# Altium PCB nixie_board.PcbDoc
Units mm, origin at the board's own origin, x right, y up, seen from the top; angles counter-clockwise.
Board outline 259.08 x 63.5 mm, 2 copper layers (Top Layer, Bottom Layer); 105 components, 92 nets, 308 pads, 36 vias.
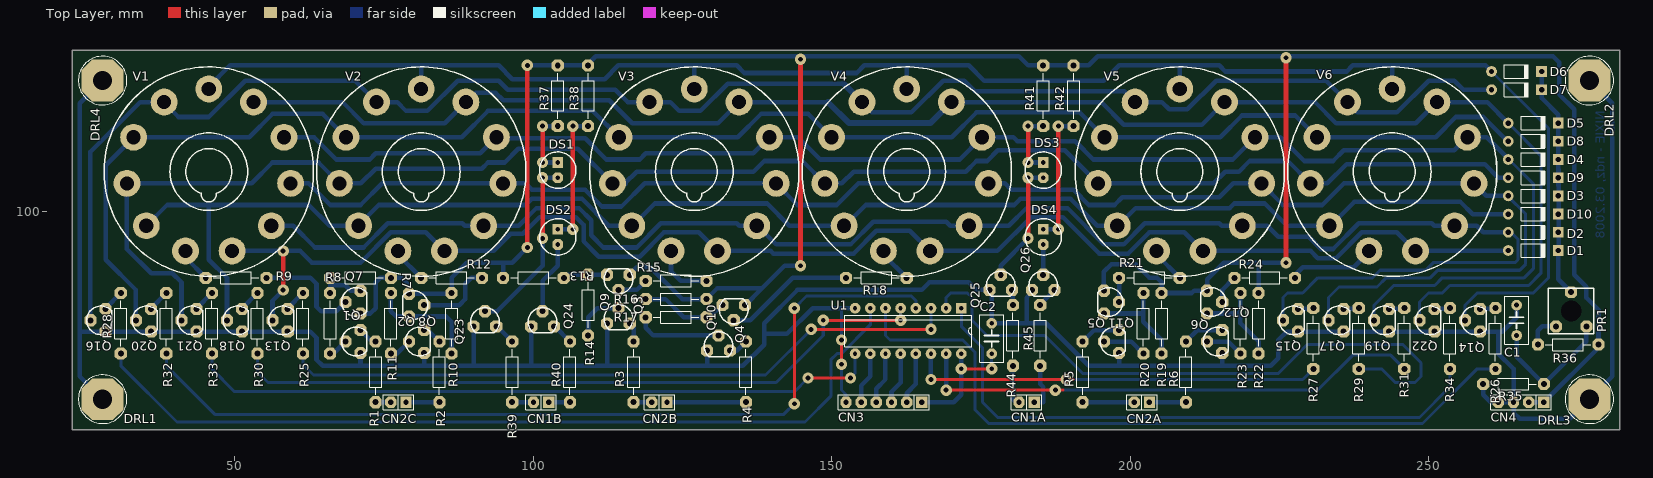
[diagram p0: Top Layer view]
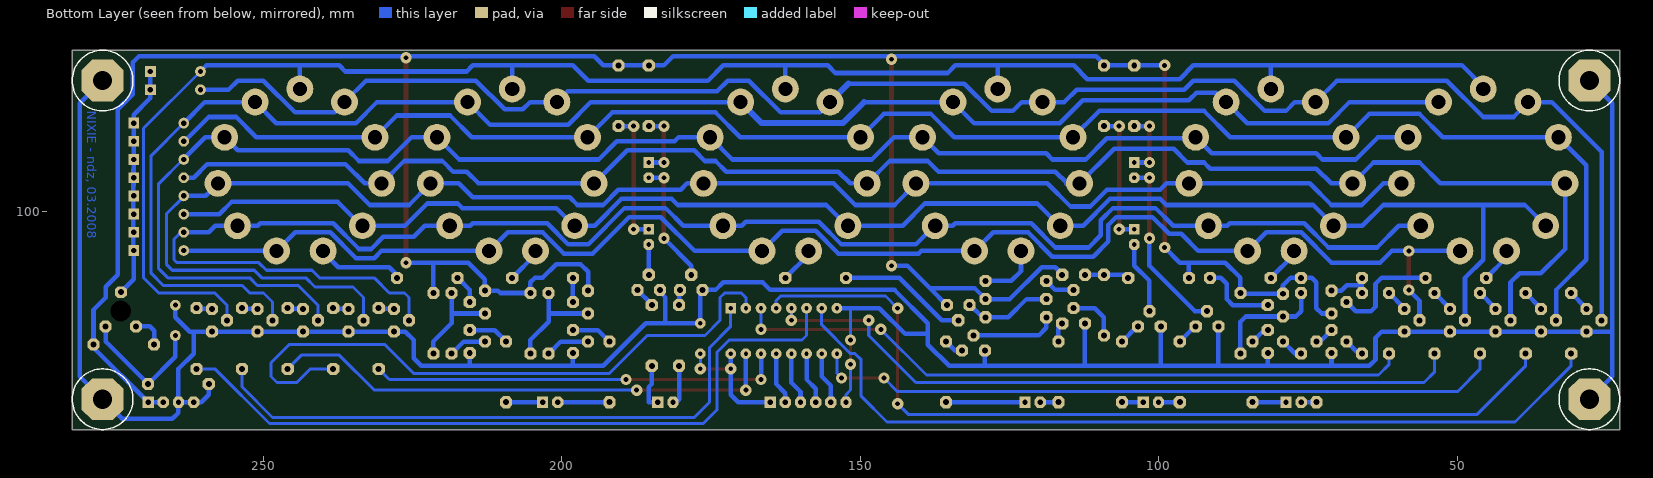
[diagram p1: Bottom Layer view, seen from below]

## Layer stack, top to bottom
Top Solder: solder mask 0.0102, Solder Resist, Dk 3.5
Top Layer: signal copper 0.0356
Dielectric1: dielectric 0.32, FR-4, Dk 4.8
Bottom Layer: signal copper 0.0356
Bottom Solder: solder mask 0.0102, Solder Resist, Dk 3.5

## Board outline
22.86,127 22.86,63.5 281.94,63.5 281.94,127

## Design rules (kind name [scope] priority, off if disabled: settings)
Clearance [All] p1: gap=0.254
FabricationTestPointUsage TestPointUsage [All] p1: valid=0 allowmultiple=FALSE
FabricationTestpoint Testpoint [All] p1: side=3 testpointundercomponent=TRUE minsize=1.016 maxsize=2.54 preferedsize=1.524 minholesize=0 maxholesize=1.016 preferedholesize=0.813 testpointgrid=0.025 allowsidetop=TRUE allowsidebottom=TRUE usegrid=TRUE gridtolerance=0
PolygonConnect [All] p1: connectstyle=Relief reliefconductorwidth=0.254 reliefentries=4 polygonreliefangle="90 Angle" airgapwidth=0.254
RoomDefinition nixie_board [InComponentClass('nixie_board')] p1: confinementstyle=ConfineIn formatcopy=TRUE lockcomponents=FALSE outline 0,0 50.8,0 50.8,25.4 0,25.4
RoutingVias [All] p1: holewidth=0.8 width=1.9 viastyle="Through Hole" minholewidth=0.711 minwidth=1.27 maxholewidth=1 maxwidth=2
SolderMaskExpansion [All] p1: expansion=0.102
Width [All] p1: maxlimit=2.54 minlimit=0.508 preferedwidth=0.762 toplayer_prefwidth=0.508 minimp=50.000000 maximp=50.000000 favimp=50.000000
28 further rules are at their usual default settings.

## Components (designator, comment, footprint, x,y, rotation, side; value= is the part's Value field where it differs from the comment)
C1 "100nF" C-RM5 264.668,81.788 r270 top
C2 "100nF" C-RM5 176.784,78.74 r270 top
CN1A "" GP2x1_maual 183.896,68.072 r180 top
CN1B "" GP2x1_maual 102.616,68.072 r180 top
CN2A "" GP2x1_maual 203.2,68.072 r180 top
CN2B "" GP2x1_maual 122.428,68.072 r180 top
CN2C "" GP2x1_maual 78.74,68.072 r180 top
CN3 "GP 6X1" GP6x1_manual 165.1,68.072 r270 top
CN4 "" GP4x1_MANUAL 269.24,68.072 r270 top
D1 "" DO35_LONG 267.462,93.472 r0 top
D2 "" DO35_LONG 267.462,96.52 r0 top
D3 "" DO35_LONG 267.462,102.616 r0 top
D4 "" DO35_LONG 267.462,108.712 r0 top
D5 "" DO35_LONG 267.462,114.808 r0 top
D6 "" DO35_LONG 264.668,123.444 r0 top
D7 "" DO35_LONG 264.668,120.396 r0 top
D8 "" DO35_LONG 267.462,111.76 r0 top
D9 "" DO35_LONG 267.462,105.664 r0 top
D10 "" DO35_LONG 267.462,99.568 r0 top
DRL1 "SCREW DRILL" "3mm screw drill I" 27.94,68.58 r0 top
DRL2 "SCREW DRILL" "3mm screw drill I" 276.86,121.92 r0 top
DRL3 "SCREW DRILL" "3mm screw drill I" 276.86,68.58 r0 top
DRL4 "SCREW DRILL" "3mm screw drill I" 27.94,121.92 r0 top
DS1 "Neon" NEON_6mm 104.14,108.204 r270 top
DS2 "Neon" NEON_6mm 104.14,97.028 r270 top
DS3 "Neon" NEON_6mm 185.42,108.204 r270 top
DS4 "Neon" NEON_6mm 185.42,97.028 r270 top
PR1 "50k" CA6V 273.812,83.312 r0 top
Q1 "BF420" TO-92 68.58,78.232 r90 top
Q2 "BF420" TO-92 79.248,78.232 r90 top
Q3 "BF420" TO-92 114.3,83.82 r0 top
Q4 "BF420" TO-92 131.064,79.248 r0 top
Q5 "BF420" TO-92 195.58,78.232 r90 top
Q6 "BF420" TO-92 212.852,78.232 r90 top
Q7 "BF421" TO-92 68.58,84.836 r90 top
Q8 "BF421" TO-92 81.788,84.328 r270 top
Q9 "BF421" TO-92 114.3,86.868 r180 top
Q10 "BF421" TO-92 133.604,81.788 r180 top
Q11 "BF421" TO-92 198.12,84.836 r270 top
Q12 "BF421" TO-92 215.392,84.836 r270 top
Q13 "BF420" TO-92 56.388,81.788 r90 top
Q14 "BF420" TO-92 256.032,81.788 r90 top
Q15 "BF420" TO-92 225.552,81.788 r90 top
Q16 "BF420" TO-92 25.908,81.788 r90 top
Q17 "BF420" TO-92 233.172,81.788 r90 top
Q18 "BF420" TO-92 48.768,81.788 r90 top
Q19 "BF420" TO-92 240.792,81.788 r90 top
Q20 "BF420" TO-92 33.528,81.788 r90 top
Q21 "BF420" TO-92 41.148,81.788 r90 top
Q22 "BF420" TO-92 248.412,81.788 r90 top
Q23 "BF420" TO-92 91.948,83.312 r0 top
Q24 "BF420" TO-92 101.6,83.312 r0 top
Q25 "BF420" TO-92 178.308,89.408 r0 top
Q26 "BF420" TO-92 185.42,89.408 r0 top
R1 "33k" R10-2 73.66,68.072 r90 top
R2 "33k" R10-2 84.328,68.072 r90 top
R3 "33k" R10-2 116.84,68.072 r90 top
R4 "33k" R10-2 135.636,68.072 r90 top
R5 "33k" R10-2 192.024,68.072 r90 top
R6 "33k" R10-2 209.296,68.072 r90 top
R7 "100k" R10-2 66.04,88.9 r0 top
R8 "470k" R10-2 66.04,76.2 r90 top
R9 "47k" R10-2 45.212,88.9 r0 top
R10 "100k" R10-2 86.36,76.2 r90 top
R11 "470k" R10-2 76.2,76.2 r90 top
R12 "47k" R10-2 81.28,88.9 r0 top
R13 "100k" R10-2 105.156,88.9 r180 top
R14 "470k" R10-2 109.22,79.248 r90 top
R15 "47k" R10-2 129.032,88.392 r180 top
R16 "100k" R10-2 118.872,85.344 r0 top
R17 "470k" R10-2 118.872,82.296 r0 top
R18 "47k" R10-2 162.56,88.9 r180 top
R19 "100k" R10-2 205.232,76.2 r90 top
R20 "470k" R10-2 202.184,76.2 r90 top
R21 "47k" R10-2 208.28,88.9 r180 top
R22 "100k" R10-2 221.488,76.2 r90 top
R23 "470k" R10-2 218.44,76.2 r90 top
R24 "47k" R10-2 227.584,88.9 r180 top
R25 "33k" R10-2 61.468,76.2 r90 top
R26 "33k" R10-2 261.112,73.66 r90 top
R27 "33k" R10-2 230.632,73.66 r90 top
R28 "33k" R10-2 30.988,76.2 r90 top
R29 "33k" R10-2 238.252,73.66 r90 top
R30 "33k" R10-2 53.848,76.2 r90 top
R31 "33k" R10-2 245.872,73.66 r90 top
R32 "33k" R10-2 38.608,76.2 r90 top
R33 "33k" R10-2 46.228,76.2 r90 top
R34 "33k" R10-2 253.492,73.66 r90 top
R35 "91k" R10-2 259.08,71.12 r0 top
R36 "300k" R10-2 268.224,77.724 r0 top
R37 "33k" R10-2 104.14,114.3 r90 top
R38 "33k" R10-2 109.22,114.3 r90 top
R39 "33k" R10-2 96.52,78.232 r270 top
R40 "33k" R10-2 106.172,78.232 r270 top
R41 "33k" R10-2 185.42,114.3 r90 top
R42 "33k" R10-2 190.5,114.3 r90 top
R44 "33k" R10-2 180.34,84.328 r270 top
R45 "33k" R10-2 184.912,84.328 r270 top
U1 "4028" DIP16_MANUAL 171.704,83.82 r270 top
V1 "Nixie Tube" LC516_NIXIE_TUBE 45.72,106.68 r0 top
V2 "Nixie Tube" LC516_NIXIE_TUBE 81.28,106.68 r0 top
V3 "Nixie Tube" LC516_NIXIE_TUBE 127,106.68 r0 top
V4 "Nixie Tube" LC516_NIXIE_TUBE 162.56,106.68 r0 top
V5 "Nixie Tube" LC516_NIXIE_TUBE 208.28,106.68 r0 top
V6 "Nixie Tube" LC516_NIXIE_TUBE 243.84,106.68 r0 top

## Footprints (in the part's own frame and the unit in brackets; to place one, negate y for a bottom-side part, rotate by r counter-clockwise, add the part's x,y. Pads: shape width x height; smd on the part's side, far side on the other; paste and mask are expansions set on the pad)
"3mm screw drill I" [mm]
  oct 7x7 hole 3.2: 0(0,0)
  silkscreen extent -4.06,-4.06 4.06,4.06
C-RM5 [mm]
  round 1.8 hole 0.8: 1(-2.54,0) 2(2.54,0)
  silkscreen extent -4,-2 4,2
CA6V [mm]
  round 0 hole 3.5: 0(0,0)
  oct 2x2 hole 1: 1(-2.54,-2.54) 2(2.54,-2.54) 3(0,3.175)
  silkscreen extent -3.81,-3.81 3.81,3.81
DIP16_MANUAL [mm]
  rect 1.8x1.8 hole 0.7: 1(0,0)
  round 1.8 hole 0.7: 2(0,-2.54) 3(0,-5.08) 4(0,-7.62) 5(0,-10.16) 6(0,-12.7) 7(0,-15.24) 8(0,-17.78) 9(7.62,-17.78) 10(7.62,-15.24) 11(7.62,-12.7) 12(7.62,-10.16) 13(7.62,-7.62) 14(7.62,-5.08) 15(7.62,-2.54) 16(7.62,0)
  silkscreen extent 1.2,-19.56 6.42,1.78
DO35_LONG [mm]
  round 1.8 hole 0.9: 1(-4.191,0)
  rect 1.8x1.8 hole 0.9: 2(4.191,0)
  silkscreen extent -2.04,-1.15 2.03,1.15
GP2x1_maual [mm] "Goldpin 2x1"
  rect 1.9x1.9 hole 0.9: 1(0,0)
  oct 1.9x1.9 hole 0.9: 2(2.54,0)
  silkscreen extent -1.27,-1.27 3.81,1.27
GP4x1_MANUAL [mm]
  rect 1.9x1.9 hole 0.9: 1(0,0)
  oct 1.9x1.9 hole 0.9: 2(0,-2.54) 3(0,-5.08) 4(0,-7.62)
  silkscreen extent -1.27,-8.89 1.27,1.27
GP6x1_manual [mm] "Goldpin 6x1"
  rect 1.9x1.9 hole 0.9: 1(0,0)
  oct 1.9x1.9 hole 0.9: 2(0,-2.54) 3(0,-5.08) 4(0,-7.62) 5(0,-10.16) 6(0,-12.7)
  silkscreen extent -1.27,-13.97 1.27,1.27
LC516_NIXIE_TUBE [mm]
  round 4.5 hole 2.36: 1(3.899,-13.283) 2(10.462,-9.065) 3(13.702,-1.972) 4(12.593,5.749) 5(7.483,11.646) 6(0,13.843) 7(-7.483,11.646) 8(-12.592,5.752) 9(-13.702,-1.97) 10(-10.463,-9.064) 11(-3.902,-13.282)
  silkscreen extent -17.52,-17.53 17.53,17.53
NEON_6mm [mm]
  rect 1.8x1.8 hole 0.8: 1(0,0)
  oct 1.8x1.8 hole 0.8: 2(2.54,0)
  silkscreen extent -1.78,-3.04 4.32,3.05
R10-2 [mil]
  oct 80x80 hole 39.37: 1(0,0) 2(400,0)
  silkscreen extent 50,-39 350,39
TO-92 [mil]
  oct 80x80 hole 39.37: 1(-75,-100) 2(0,0) 3(75,-100)
  silkscreen extent -94,-141 94,24

## Part data
C1 C2: library part Cap, "Capacitor"
CN1A CN1B CN2A CN2B CN2C: library part "GP 2X1", "Goldpin, 2-Pin"
CN3: "Gold Pin, 6-Pin"
CN4: library part "GP 4X1", "Gold Pin, 4-Pin"
D1 D2 D3 D4 D5 D6 D7 D8 D9 D10: library part BAVP21, "Fast rectifier diode: 250V 0.25A, <50ns DO35"
DRL1 DRL2 DRL3 DRL4: "Screw Drill"
DS1 DS2 DS3 DS4: "Neon Bulb"
PR1: library part RPot, "Potentiometer"
Q1 Q2 Q3 Q4 Q5 Q6 Q13 Q14 Q15 Q16 Q17 Q18 Q19 Q20 Q21 Q22 Q23 Q24 Q25 Q26: "NPN Transistor, 300V, 0.1A, 0.83W"
Q7 Q8 Q9 Q10 Q11 Q12: "PNP Transistor, 300V, 0.1A, 0.83W"
R1 R2 R3 R4 R5 R6 R7 R8 R9 R10 R11 R12 R13 R14 R15 R16 R17 R18 R19 R20 R21 R22 R23 R24 R25 R26 R27 R28 R29 R30 R31 R32 R33 R34 R35 R36 R37 R38 R39 R40 R41 R42 R44 R45: library part Res, "Resistor"
U1: "BCD-to-Decimal Decoder"
V1 V2 V3 V4 V5 V6: library part LC516, "LC-516 Nixie Tube"

## Via types
v1: diameter 1.9, hole 0.8, Top Layer to Bottom Layer, 36 vias

## Nets (pads, with @x,y where several pads share a name; then routed paths per layer and width w, separated by ;. In a path a pad name is that pad's centre, name@x,y a point inside that pad or via, vN(x,y) a via of type N, cw(c..) or ccw(c..) an arc to the next point about the centre after c; other vN are vias at no path point)
ANODE_H1: CN2C.1 R2.1 | length 5.6
  Bottom Layer w0.762: CN2C.1 R2.1
ANODE_H10: CN2C.2 R1.1 | length 2.5
  Bottom Layer w0.762: R1.1 CN2C.2
ANODE_M1: CN2B.1 R4.1 | length 13.2
  Bottom Layer w0.762: CN2B.1 R4.1
ANODE_M10: CN2B.2 R3.1 | length 3
  Bottom Layer w0.762: R3.1 CN2B.2
ANODE_S1: CN2A.1 R6.1 | length 5.1
  Bottom Layer w0.762: CN2A.1 R6.1@208.28,68.072
ANODE_S10: CN2A.2 R5.1 | length 8.6
  Bottom Layer w0.762: R5.1 CN2A.2
GND: C1.1 C2.1 CN3.6 CN4.3 CN4.4 DRL1.0 DRL2.0 DRL3.0 DRL4.0 Q1.1 Q2.1 Q3.1 Q4.1 Q5.1 Q6.1 Q13.1 Q14.1 Q15.1 Q16.1 Q17.1 Q18.1 Q19.1 Q20.1 Q21.1 Q22.1 Q23.1 Q24.1 Q25.1 Q26.1 R35.1 U1.8 | length 489.6
  Top Layer w0.508: v1(151.638,74.422) v1(151.638,78.486)
  Bottom Layer w0.508: v1(151.638,74.422) 151.638,70.104 152.4,69.342 CN3.6 ; v1(151.638,78.486) 151.638,83.82
  Bottom Layer w0.762: DRL4.0 24.13,118.11 24.13,79.756 ; DRL1.0@28.194,68.326 DRL1.0 24.13,72.39 24.13,79.756 ; Q1.1 71.12,74.168 ; Q2.1 81.788,74.168 ; Q23.1 90.043,74.295 90.17,74.168 ; Q24.1 99.695,74.295 99.822,74.168 ; Q3.1 112.395,74.295 112.268,74.168 ; Q4.1 129.159,74.295 129.032,74.168 ; U1.8 151.638,83.82 146.812,83.82 142.494,79.502 138.684,79.502 ; Q26.1 183.515,86.487 182.626,85.598 182.626,81.28 ; Q5.1 198.12,74.168 ; Q6.1 215.392,74.168 ; R35.1 259.08,69.342 260.35,68.072 CN4.4 CN4.3 ; C1.1 264.668,82.296 262.255,79.883 261.62,79.883 ; DRL2.0 280.67,118.11 280.67,72.39 DRL3.0 273.558,65.278 265.176,65.278 264.16,66.294 CN4.3 ; 24.13,79.756 24.257,79.883 Q16.1 Q20.1 Q21.1 Q18.1 Q13.1 62.738,79.883 63.754,78.867 63.754,75.184 64.77,74.168 71.12,74.168 ; 71.12,74.168 81.788,74.168 ; 81.788,74.168 90.17,74.168 ; 90.17,74.168 99.822,74.168 ; 99.822,74.168 112.268,74.168 ; 112.268,74.168 129.032,74.168 ; 129.032,74.168 135.128,74.168 138.684,77.724 138.684,79.502 ; 138.684,79.502 138.684,81.28 144.272,86.868 165.1,86.868 166.37,88.138 172.974,88.138 174.244,86.868 Q25.1 176.784,86.487 C2.1 182.626,81.28 ; 182.626,81.28 185.928,81.28 193.04,74.168 198.12,74.168 ; 198.12,74.168 215.392,74.168 ; 215.392,74.168 223.52,74.168 224.79,75.438 224.79,78.486 226.187,79.883 Q15.1 Q17.1 Q19.1 Q22.1 Q14.1 261.62,79.883 ; 261.62,79.883 261.62,76.2 264.16,73.66 CN4.3
NEON1A: CN1A.2 R44.2 | length 6.3
  Bottom Layer w0.762: R44.2 180.34,68.58 CN1A.2@180.848,68.072
NEON1B: CN1B.2 R39.2 | length 3.6
  Bottom Layer w0.762: R39.2 CN1B.2
NEON2A: CN1A.1 R45.2 | length 7.8
  Bottom Layer w0.762: CN1A.1 185.42,68.072 185.42,70.612 184.912,71.12 R45.2
NEON2B: CN1B.1 R40.2 | length 3.6
  Bottom Layer w0.762: CN1B.1 R40.2
NetC1_2: C1.2 PR1.2 R35.2 | length 22.6
  Bottom Layer w0.762: C1.2 264.668,75.692 R35.2 276.352,78.232 PR1.2
NetCN3_2: CN3.2 U1.13 | length 8.8
  Bottom Layer w0.762: CN3.2 162.56,69.596 164.084,71.12 U1.13
NetCN3_3: CN3.3 U1.12 | length 8.8
  Bottom Layer w0.762: CN3.3 160.02,69.85 161.544,71.374 U1.12
NetCN3_4: CN3.4 U1.11 | length 8.8
  Bottom Layer w0.762: CN3.4 157.48,70.358 159.004,71.882 U1.11
NetCN3_5: CN3.5 U1.10 | length 8.8
  Bottom Layer w0.762: CN3.5 154.94,70.866 156.464,72.39 U1.10
NetD1_1: D1.1 Q13.2 V1.1 V2.1 V3.1 V4.1 V5.1 V6.1 | length 254.6
  Top Layer w0.762: v1(58.166,86.868) v1(58.166,93.397) v1@58.166,93.726
  Bottom Layer w0.762: V1.1 v1(58.166,93.397) 61.035,93.397 62.992,91.44 71.12,91.44 76.2,96.52 82.057,96.52 V2.1 93.397,93.397 96.266,96.266 98.298,96.266 101.092,99.06 107.188,99.06 108.458,97.79 108.458,94.996 110.998,92.456 117.856,92.456 121.92,96.52 127.777,96.52 V3.1 139.775,93.397 140.208,92.964 153.67,92.964 157.48,96.774 163.083,96.774 V4.1 177.725,93.397 183.388,99.06 188.722,99.06 194.818,92.964 199.644,92.964 203.2,96.52 209.057,96.52 V5.1 230.199,93.397 231.394,92.202 234.442,92.202 238.76,96.52 244.617,96.52 V6.1 263.196,93.397 D1.1 ; Q13.2 56.388,85.09 v1(58.166,86.868)
NetD1_2: D1.2 D2.2 D3.2 D4.2 D5.2 D6.2 D7.2 D8.2 D9.2 D10.2 PR1.3 | length 39.5
  Bottom Layer w0.762: D6.2@268.859,123.952 D6.2 D7.2 268.859,118.999 271.653,116.205 D5.2 D8.2 271.667,108.712 271.682,105.664 271.696,102.616 271.711,99.568 271.725,96.52 D1.2@271.74,93.472 ; D1.2 271.653,88.646 PR1.3
NetD2_1: D2.1 Q15.2 V1.2 V2.2 V3.2 V4.2 V5.2 V6.2 | length 281.9
  Bottom Layer w0.508: Q15.2 225.552,85.598 226.314,86.36 228.854,86.36 231.394,88.9 240.538,88.9 241.808,90.17 249.428,90.17 250.698,91.44 264.414,91.44 264.922,91.948 264.922,95.377 D2.1@263.271,97.028
  Bottom Layer w0.762: V1.2 59.865,97.615 63.5,93.98 71.628,93.98 75.692,98.044 88.138,98.044 88.567,97.615 V2.2 97.615,97.615 100.584,100.584 107.696,100.584 109.728,98.552 109.728,96.012 111.76,93.98 117.348,93.98 121.412,98.044 134.112,98.044 134.541,97.615 V3.2 ; V3.2@137.589,97.615 140.716,94.488 153.162,94.488 156.972,98.298 169.164,98.298 169.847,97.615 V4.2 179.657,97.615 182.626,100.584 189.484,100.584 195.58,94.488 198.882,94.488 202.438,98.044 214.884,98.044 215.313,97.615 V5.2 ; V5.2@218.742,97.488 V5.2 ; D2.1 259.08,96.52 257.985,97.615 V6.2 250.873,97.615 250.444,98.044 238.252,98.044 233.934,93.726 231.902,93.726 229.87,95.758 224.79,95.758 222.933,97.615 V5.2
NetD3_1: D3.1 Q17.2 V1.3 V2.3 V3.3 V4.3 V5.3 V6.3 | length 271.8
  Bottom Layer w0.508: Q17.2 233.172,85.598 234.95,87.376 241.3,87.376 242.824,88.9 250.19,88.9 251.46,90.17 265.176,90.17 266.192,91.186 266.192,99.568 D3.1@263.271,102.489
  Bottom Layer w0.762: V1.3 62.424,104.708 66.04,101.092 71.12,101.092 74.736,104.708 V2.3 98.746,104.708 99.822,103.632 108.712,103.632 111.506,100.838 114.808,100.838 118.678,104.708 V3.3 140.702,104.662 144.272,101.092 150.876,101.092 154.492,104.708 V4.3 179.01,104.708 180.086,103.632 190.5,103.632 193.04,101.092 197.358,101.092 198.628,102.362 214.884,102.362 217.23,104.708 V5.3 221.982,104.662 225.552,101.092 232.156,101.092 235.772,104.708 V6.3 257.542,104.662 259.588,102.616 D3.1 D3.1@263.271,102.489
NetD4_1: D4.1 Q19.2 V1.4 V2.4 V3.4 V4.4 V5.4 V6.4 | length 274.1
  Bottom Layer w0.508: Q19.2 240.792,84.328 244.094,87.63 250.952,87.63 252.222,88.9 265.938,88.9 267.462,90.424 267.462,104.648 D4.1@263.398,108.712
  Bottom Layer w0.762: V1.4 63.339,112.429 67.056,108.712 72.644,108.712 73.66,109.728 91.171,109.728 V2.4@93.7,112.257 ; V2.4 V2.4@93.7,112.257 ; D4.1@263.398,108.712 D4.1 263.271,108.839 259.681,112.429 V6.4 254.239,110.236 235.712,110.236 233.934,108.458 229.108,108.458 225.137,112.429 V5.4 217.155,108.712 193.802,108.712 190.754,111.76 181.102,111.76 180.433,112.429 V4.4 171.435,108.712 148.082,108.712 144.365,112.429 V3.4 136.891,109.728 118.872,109.728 117.856,108.712 112.268,108.712 108.723,112.257 V2.4@93.7,112.257
NetD5_1: D5.1 Q22.2 V1.5 V2.5 V3.5 V4.5 V5.5 V6.5 | length 280.4
  Bottom Layer w0.508: Q22.2 248.412,84.836 249.936,86.36 252.222,86.36 253.492,87.63 266.7,87.63 268.732,89.662 268.732,109.347 D5.1
  Bottom Layer w0.762: V1.5 68.11,118.326 71.628,114.808 85.244,114.808 V2.5 ; V2.5@88.862,118.326 90.424,119.888 93.726,119.888 94.996,118.618 112.776,118.618 116.586,114.808 130.964,114.808 V3.5 149.39,118.326 ; V4.5 195.11,118.326 198.882,114.554 211.99,114.554 V5.5 230.924,118.326 234.442,114.808 247.804,114.808 V6.5 259.753,118.326 D5.1
  Bottom Layer w1.016: V2.5 V2.5@88.862,118.326 ; 149.39,118.326 152.908,114.808 166.524,114.808 V4.5
NetD6_1: D6.1 Q14.2 V1.6 V2.6 V3.6 V4.6 V5.6 V6.6 | length 299.5
  Bottom Layer w0.508: Q14.2 256.032,84.328 258.064,86.36 267.462,86.36 270.002,88.9 270.002,113.919 D6.1
  Bottom Layer w0.762: V1.6@45.72,120.904 49.276,124.46 81.28,124.46 ; V2.6 81.28,124.46 ; V3.6 127,124.46 ; V4.6 162.56,124.46 ; V5.6 208.28,124.46 ; V6.6 243.84,124.46 ; D6.1 259.461,124.46 243.84,124.46 ; 81.28,124.46 94.234,124.46 96.52,122.174 112.014,122.174 114.3,124.46 127,124.46 ; 127,124.46 134.112,124.46 135.382,123.19 154.178,123.19 155.448,124.46 162.56,124.46 ; 162.56,124.46 172.974,124.46 175.514,121.92 195.58,121.92 198.12,124.46 208.28,124.46 ; 208.28,124.46 214.884,124.46 215.9,123.444 236.22,123.444 237.236,124.46 243.84,124.46
  Bottom Layer w1.016: V1.6 V1.6@45.72,120.904
NetD7_1: D7.1 Q16.2 V1.7 V2.7 V3.7 V4.7 V5.7 V6.7 | length 291.4
  Bottom Layer w0.762: Q16.2 25.908,109.982 34.252,118.326 V1.7 ; V1.7@38.237,118.227 40.64,115.824 45.72,115.824 51.816,121.92 70.204,121.92 V2.7 77.254,118.326 78.74,116.84 82.296,116.84 87.376,121.92 94.234,121.92 95.758,120.396 113.792,120.396 115.862,118.326 V3.7 122.974,118.326 124.46,116.84 128.016,116.84 132.588,121.412 151.992,121.412 ; V4.7 155.077,118.227 156.718,116.586 163.322,116.586 168.656,121.92 172.212,121.92 173.99,120.142 198.982,120.142 V5.7 205.27,118.326 206.502,117.094 209.55,117.094 214.376,121.92 232.764,121.92 V6.7 236.357,118.227 237.998,116.586 244.602,116.586 249.936,121.92 254.254,121.92 255.778,120.396 D7.1
  Bottom Layer w1.016: V1.7@38.237,118.227 V1.7 ; 151.992,121.412 V4.7
NetD8_1: D8.1 Q20.2 V1.8 V2.8 V3.8 V4.8 V5.8 V6.8 | length 284.5
  Bottom Layer w0.762: Q20.2 33.528,86.868 28.448,91.948 28.448,107.751 V1.8 52.488,112.432 56.388,116.332 64.788,116.332 V2.8 88.048,112.432 92.456,116.84 110,116.84 V3.8 134.276,112.432 138.176,116.332 146.068,116.332 V4.8 170.09,112.432 174.244,116.586 191.534,116.586 V5.8 215.048,112.432 218.694,116.078 227.602,116.078 V6.8 251.116,112.432 254.508,115.824 259.08,115.824 263.144,111.76 D8.1
NetD9_1: D9.1 Q21.2 V1.9 V2.9 V3.9 V4.9 V5.9 V6.9 | length 281.2
  Bottom Layer w0.762: V1.9@32.004,105.156 32.004,93.726 36.068,89.662 39.624,89.662 41.148,88.138 Q21.2 ; V1.9 52.894,104.71 56.388,108.204 64.084,108.204 V2.9 71.182,104.71 73.66,107.188 91.44,107.188 92.456,108.204 95.25,108.204 97.536,110.49 107.518,110.49 V3.9 ; V3.9@115.378,104.71 117.348,106.68 136.906,106.68 138.684,108.458 145.11,108.458 V4.9 151.7,104.71 153.67,106.68 172.466,106.68 174.244,108.458 176.022,108.458 177.8,110.236 189.052,110.236 V5.9 213.93,104.71 215.9,106.68 218.186,106.68 219.964,108.458 226.39,108.458 V6.9 232.98,104.71 236.22,107.95 259.334,107.95 261.62,105.664 D9.1
  Bottom Layer w1.016: V3.9 V3.9@115.378,104.71
NetD10_1: D10.1 Q18.2 V1.10 V2.10 V3.10 V4.10 V5.10 V6.10 | length 267.6
  Bottom Layer w0.762: V1.10 38.732,101.092 45.72,101.092 ; Q18.2 48.768,88.9 45.72,91.948 45.72,101.092 ; V2.10 65.96,97.616 62.484,101.092 45.72,101.092 ; V2.10@70.817,97.741 74.168,101.092 98.806,101.092 99.822,102.108 108.204,102.108 112.696,97.616 V3.10 116.666,97.616 120.396,101.346 139.192,101.346 142.922,97.616 V4.10 152.226,97.616 155.702,101.092 180.594,101.092 181.61,102.108 189.992,102.108 194.484,97.616 V5.10 V5.10@197.817,97.741 ; V5.10@197.946,97.616 200.914,100.584 216.662,100.584 217.424,101.346 222.504,101.346 226.234,97.616 V6.10 233.506,97.616 237.49,101.6 255.27,101.6 257.302,99.568 D10.1
  Bottom Layer w1.016: V2.10 V2.10@70.817,97.741
NetDS1_1: DS1.1 R37.1 | length 11.2
  Top Layer w0.762: v1(101.6,108.204) v1(101.6,114.3)
  Bottom Layer w0.762: v1(101.6,108.204) DS1.1 ; v1(101.6,114.3) R37.1
NetDS1_2: DS1.2 Q23.2 | length 30.1
  Top Layer w0.762: v1(101.6,95.504) v1(101.6,105.664)
  Bottom Layer w0.762: Q23.2 93.98,83.312 101.6,90.932 v1(101.6,95.504) ; v1(101.6,105.664) DS1.2
NetDS2_1: DS2.1 R38.1 | length 22.2
  Top Layer w0.762: v1(106.68,97.028) v1(106.68,114.3)
  Bottom Layer w0.762: DS2.1 v1@106.513,97.028 ; v1(106.68,114.3) R38.1
NetDS2_2: DS2.2 Q24.2 | length 12.2
  Bottom Layer w0.762: Q24.2 101.6,88.392 104.14,90.932 DS2.2
NetDS3_1: DS3.1 R41.1 | length 11.2
  Top Layer w0.762: v1(182.88,108.204) v1(182.88,114.3)
  Bottom Layer w0.762: v1(182.88,108.204) DS3.1 ; v1(182.88,114.3) R41.1
NetDS3_2: DS3.2 Q25.2 | length 20.7
  Top Layer w0.762: v1(182.88,95.504) v1(182.88,105.664)
  Bottom Layer w0.762: Q25.2 178.308,90.932 v1(182.88,95.504) ; v1(182.88,105.664) DS3.2
NetDS4_1: DS4.1 R42.1 | length 22.4
  Top Layer w0.762: v1(187.96,97.028) v1(187.96,114.3)
  Bottom Layer w0.762: DS4.1 v1(187.96,97.028) ; v1(187.96,114.3) R42.1
NetDS4_2: DS4.2 Q26.2 | length 5.1
  Bottom Layer w0.762: Q26.2 DS4.2
NetPR1_1: PR1.1 R36.1 | length 5.1
  Bottom Layer w0.762: R36.1 268.224,80.01 268.986,80.772 PR1.1@270.764,80.772
NetQ1_2: Q1.2 R8.1 | length 3.4
  Bottom Layer w0.762: R8.1 66.548,76.2 Q1.2
NetQ1_3: Q1.3 R1.2 | length 3.3
  Bottom Layer w0.762: Q1.3 73.025,78.232 R1.2
NetQ2_2: Q2.2 R11.1 | length 3.9
  Bottom Layer w0.762: R11.1 77.216,76.2 Q2.2
NetQ2_3: Q2.3 R2.2 | length 3.3
  Bottom Layer w0.762: Q2.3 82.423,80.137 R2.2
NetQ3_2: Q3.2 R14.1 | length 8.8
  Bottom Layer w0.762: R14.1 109.22,82.296 110.744,83.82 Q3.2
NetQ3_3: Q3.3 R3.2 | length 3.3
  Bottom Layer w0.762: Q3.3 116.84,80.645 R3.2
NetQ4_2: Q4.2 R17.1 | length 14.5
  Bottom Layer w0.762: R17.1 118.872,80.518 120.142,79.248 Q4.2
NetQ4_3: Q4.3 R4.2 | length 3.3
  Bottom Layer w0.762: Q4.3 134.112,76.708 R4.2
NetQ5_2: Q5.2 R20.1 | length 7.4
  Bottom Layer w0.762: Q5.2 200.152,78.232 R20.1
NetQ5_3: Q5.3 R5.2 | length 6.9
  Bottom Layer w0.762: R5.2 193.929,80.137 Q5.3
NetQ6_2: Q6.2 R23.1 | length 6.4
  Bottom Layer w0.762: Q6.2 216.408,78.232 R23.1
NetQ6_3: Q6.3 R6.2 | length 6.9
  Bottom Layer w0.762: R6.2 211.201,80.137 Q6.3
NetQ7_2: Q7.2 R9.2 | length 18.4
  Bottom Layer w0.762: R9.2 62.738,88.9 63.754,87.884 63.754,84.074 64.516,83.312 67.056,83.312 Q7.2
NetQ7_3: Q7.3 R7.1 R8.2 | length 8
  Bottom Layer w0.762: R8.2 66.04,87.63 ; R7.1 66.04,87.63 ; Q7.3 69.469,86.741 68.58,87.63 66.04,87.63
NetQ8_2: Q8.2 R12.2 | length 13.3
  Bottom Layer w0.762: Q8.2@81.534,84.328 Q8.2 87.63,84.328 88.646,85.344 88.646,87.884 89.662,88.9 R12.2
NetQ8_3: Q8.3 R10.1 R11.2 | length 19.3
  Bottom Layer w0.762: R11.2 76.2,83.312 77.089,82.423 Q8.3 85.471,82.423 86.36,81.534 R10.1
NetQ9_2: Q9.2 R15.2 | length 5.2
  Bottom Layer w0.762: Q9.2 117.348,86.868 R15.2
NetQ9_3: Q9.3 R13.1 R14.2 | length 7.4
  Bottom Layer w0.762: R13.1 105.664,89.408 R14.2 Q9.3
NetQ10_2: Q10.2 R18.2 | length 21.7
  Bottom Layer w0.762: Q10.2 136.398,81.788 143.51,88.9 R18.2
NetQ10_3: Q10.3 R16.1 R17.2 | length 14.9
  Bottom Layer w0.762: R16.1 122.174,85.344 125.222,82.296 R17.2 129.54,82.296 131.572,84.328 Q10.3
NetQ11_2: Q11.2 R21.2 | length 4.1
  Bottom Layer w0.762: Q11.2 R21.2
NetQ11_3: Q11.3 R19.1 R20.2 | length 18.1
  Bottom Layer w0.762: Q11.3 202.057,82.931 202.184,82.804 ; R20.2 202.184,82.804 ; R19.1 205.232,78.486 202.184,81.534 202.184,82.804
NetQ12_2: Q12.2 R24.2 | length 4.9
  Bottom Layer w0.762: Q12.2 215.392,86.868 R24.2
NetQ12_3: Q12.3 R22.1 R23.2 | length 17.1
  Bottom Layer w0.762: Q12.3 218.313,82.931 218.44,83.058 ; R23.2 218.44,83.058 ; R22.1 221.488,78.232 218.44,81.28 218.44,83.058
NetQ13_3: Q13.3 R25.2 | length 3.7
  Bottom Layer w0.762: Q13.3 58.928,83.82 R25.2
NetQ14_3: Q14.3 R26.2 | length 2.6
  Bottom Layer w0.762: Q14.3 260.985,83.693 R26.2
NetQ15_3: Q15.3 R27.2 | length 2.6
  Bottom Layer w0.762: Q15.3 230.505,83.693 R27.2
NetQ16_3: Q16.3 R28.2 | length 3.7
  Bottom Layer w0.762: Q16.3 28.448,83.82 R28.2
NetQ17_3: Q17.3 R29.2 | length 2.6
  Bottom Layer w0.762: Q17.3 238.125,83.693 R29.2
NetQ18_3: Q18.3 R30.2 | length 3.7
  Bottom Layer w0.762: Q18.3 51.308,83.82 R30.2
NetQ19_3: Q19.3 R31.2 | length 2.6
  Bottom Layer w0.762: Q19.3 245.745,83.693 R31.2
NetQ20_3: Q20.3 R32.2 | length 3.7
  Bottom Layer w0.762: Q20.3 36.068,83.82 R32.2
NetQ21_3: Q21.3 R33.2 | length 3.7
  Bottom Layer w0.762: Q21.3 43.688,83.82 R33.2
NetQ22_3: Q22.3 R34.2 | length 2.6
  Bottom Layer w0.762: Q22.3 253.365,83.693 R34.2
NetQ23_3: Q23.3 R39.1 | length 3.7
  Bottom Layer w0.762: Q23.3 93.98,80.772 R39.1
NetQ24_3: Q24.3 R40.1 | length 3.7
  Bottom Layer w0.762: Q24.3 103.632,80.772 R40.1
NetQ25_3: Q25.3 R44.1 | length 3.1
  Bottom Layer w0.762: R44.1@180.213,83.947 180.213,84.275 R44.1 180.34,86.741 Q25.3
NetQ26_3: Q26.3 R45.1 | length 4.2
  Bottom Layer w0.762: R45.1 184.912,84.455 Q26.3 Q26.3@187.325,86.233
NetR9_1: R9.1 V1.11 | length 5.9
  Bottom Layer w0.762: V1.11 41.818,92.294 R9.1
NetR12_1: R12.1 V2.11 | length 6.1
  Bottom Layer w0.762: V2.11 77.378,92.802 R12.1
NetR15_1: R15.1 V3.11 | length 10
  Bottom Layer w0.762: V3.11 123.098,90.008 124.714,88.392 R15.1
NetR18_1: R18.1 V4.11 | length 6.1
  Bottom Layer w0.762: V4.11 158.658,92.802 R18.1
NetR21_1: R21.1 V5.11 | length 6.1
  Bottom Layer w0.762: V5.11 204.378,92.802 R21.1
NetR24_1: R24.1 V6.11 | length 15.2
  Bottom Layer w0.762: R24.1@227.076,88.9 228.854,90.678 237.398,90.678 V6.11@239.938,93.218 ; V6.11@239.938,92.802 V6.11
NetR25_1: R25.1 U1.3 | length 114.4
  Top Layer w0.508: v1(146.558,80.264) v1(166.624,80.264)
  Bottom Layer w0.508: R25.1 61.468,74.422 63.246,72.644 138.938,72.644 v1(146.558,80.264) ; v1(166.624,80.264) U1.3
NetR26_1: R26.1 U1.6 | length 122.2
  Bottom Layer w0.508: U1.6 159.004,79.248 159.766,78.486 171.958,78.486 173.99,76.454 173.99,66.802 176.276,64.516 248.92,64.516 258.064,73.66 R26.1
NetR27_1: R27.1 U1.14 | length 70.3
  Top Layer w0.508: v1(166.624,71.882) 190.5,71.882
  Bottom Layer w0.508: v1(189.23,71.882) 228.854,71.882 R27.1
  Bottom Layer w0.762: v1(166.624,71.882) U1.14
NetR28_1: R28.1 U1.7 | length 144.5
  Bottom Layer w0.508: R28.1 30.988,74.168 40.386,64.77 145.542,64.77 149.86,69.088 149.86,75.184 150.876,76.2 151.638,76.2 156.464,81.026 U1.7
NetR29_1: R29.1 U1.2 | length 106.7
  Bottom Layer w0.508: U1.2 169.164,85.598 169.926,86.36 172.72,86.36 173.482,85.598 173.482,81.788 176.022,79.248 185.674,79.248 192.024,72.898 224.79,72.898 229.616,77.724 245.618,77.724 248.666,74.676 248.666,72.39 247.65,71.374 244.348,71.374 242.062,73.66 R29.1
NetR30_1: R30.1 U1.5 | length 119.3
  Top Layer w0.508: v1(148.59,81.788) v1(161.544,81.788)
  Bottom Layer w0.508: R30.1 53.848,73.152 55.626,71.374 140.716,71.374 148.59,79.248 v1(148.59,81.788) ; v1(161.544,81.788) U1.5
NetR31_1: R31.1 U1.15 | length 87.4
  Top Layer w0.508: v1(169.164,70.104) 188.722,70.104
  Bottom Layer w0.508: v1(187.452,70.104) 231.394,70.104 237.236,75.946 243.586,75.946 R31.1
  Bottom Layer w0.762: v1(169.164,70.104) U1.15
NetR32_1: R32.1 U1.4 | length 150
  Top Layer w0.508: v1(143.764,67.818) v1(143.764,83.82)
  Bottom Layer w0.508: R32.1 38.608,74.168 46.736,66.04 141.986,66.04 v1(143.764,67.818) ; v1(143.764,83.82) 145.796,85.852 163.322,85.852 164.084,85.09 U1.4
NetR33_1: R33.1 U1.9 | length 116.1
  Top Layer w0.508: v1(146.05,72.136) v1(153.162,72.136)
  Bottom Layer w0.508: R33.1@46.228,75.946 46.228,73.66 50.038,69.85 143.764,69.85 v1(146.05,72.136) ; v1(153.162,72.136) 153.924,72.898 U1.9
NetR34_1: R34.1 U1.1 | length 101.7
  Bottom Layer w0.508: U1.1 171.704,80.772 175.26,77.216 175.26,68.072 177.8,65.532 248.412,65.532 253.492,70.612 R34.1
VCC_5V: C2.2 CN3.1 U1.16 | length 21.6
  Top Layer w0.508: v1(171.704,73.66) v1(176.784,73.66)
  Bottom Layer w0.508: v1(176.784,73.66) C2.2
  Bottom Layer w0.762: CN3.1 170.434,68.072 171.704,69.342 U1.16
VCC_170V: CN4.1 CN4.2 Q7.1 Q8.1 Q9.1 Q10.1 Q11.1 Q12.1 R7.2 R10.2 R13.2 R16.2 R19.2 R22.2 R36.2 R37.2 R38.2 R41.2 R42.2 | length 465.6
  Top Layer w0.762: v1(99.06,93.98) v1(99.06,124.46) ; v1(144.78,90.932) v1(144.78,125.476) ; v1(226.06,91.44) v1(226.06,125.73)
  Bottom Layer w0.762: Q7.1 72.771,82.931 73.66,83.82 73.66,88.138 74.422,88.9 R7.2 77.978,88.9 79.248,87.63 Q8.1 86.233,86.233 R10.2 86.36,88.9 88.9,91.44 94.996,91.44 ; R13.2 94.996,91.44 ; v1(99.06,93.98) 96.52,91.44 94.996,91.44 ; v1(99.06,124.46) R37.2 108.966,124.46 110.49,125.984 v1@144.78,125.984 ; Q9.1 116.205,89.535 117.348,90.678 119.634,90.678 124.968,85.344 R16.2 130.81,87.122 138.303,87.122 ; Q10.1 138.303,87.122 ; v1(144.78,90.932) 142.113,90.932 138.303,87.122 ; v1(144.78,125.476) v1@144.78,125.984 ; Q11.1 195.58,89.916 196.85,91.186 200.914,91.186 203.2,88.9 204.47,88.9 205.232,88.138 R19.2 210.312,86.36 210.693,86.741 Q12.1 212.852,88.646 215.646,91.44 221.488,91.44 ; R22.2 221.488,91.44 ; v1(226.06,91.44) 221.488,91.44 ; CN4.2 CN4.1 R36.2@278.384,77.216 ; R36.2 278.384,83.566 276.352,85.598 276.352,87.376 274.32,89.408 274.32,117.094 271.78,119.634 271.78,124.968 270.764,125.984 194.564,125.984 193.04,124.46 R42.2 R41.2 182.88,124.46 181.356,125.984 v1@144.78,125.984
pads on no net: PR1.0

## Other copper
Bottom Layer:
  text "NIXIE - ndz, 03.2008" at 279.4,116.84 h1.52 r90

## Silkscreen, mask and mechanical layers (free items; w line width, h text height)
Mechanical 1:
  the board outline again, w0.3